# Altium PCB LED_Driver.PcbDoc
Units mil, origin at the board's own origin, x right, y up, seen from the top; angles counter-clockwise.
Board outline 779.9 x 913.27 mil, 2 copper layers (Top Layer, Bottom Layer); 30 components, 21 nets, 95 pads, 11 vias.
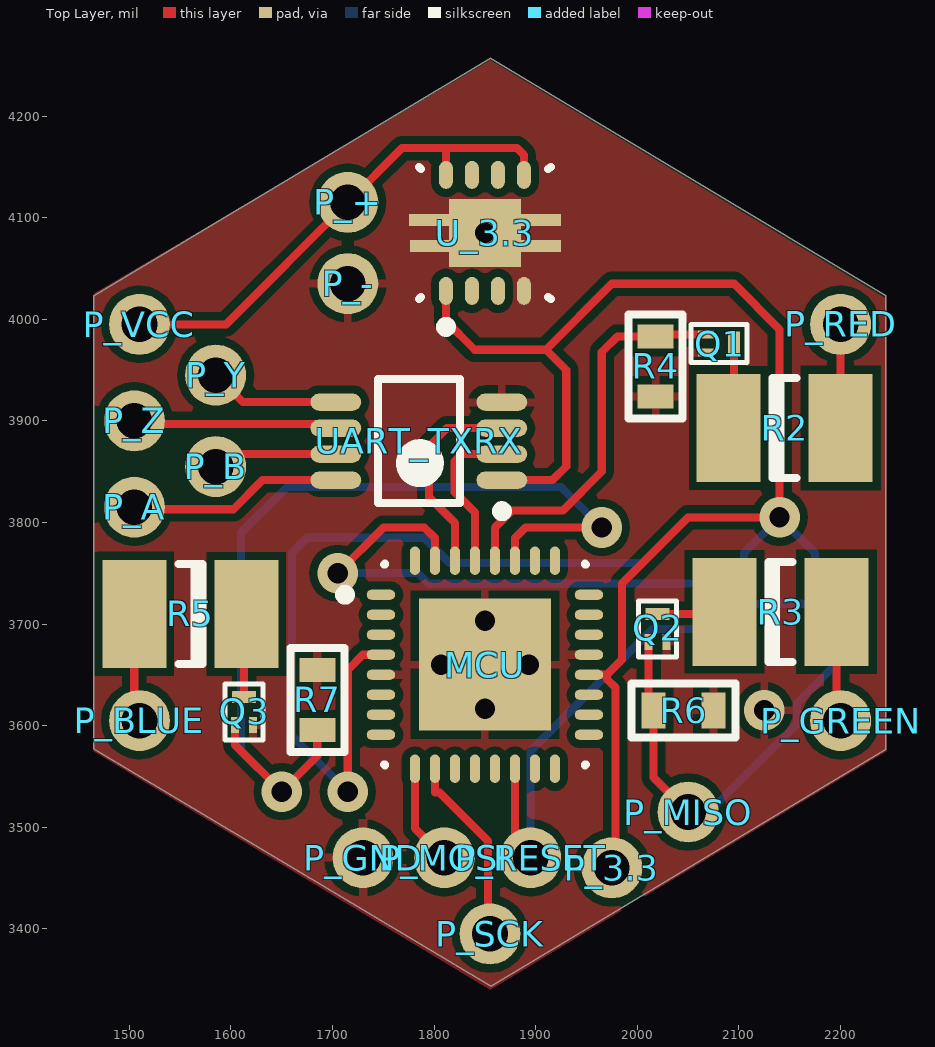
[diagram p0: Top Layer view]
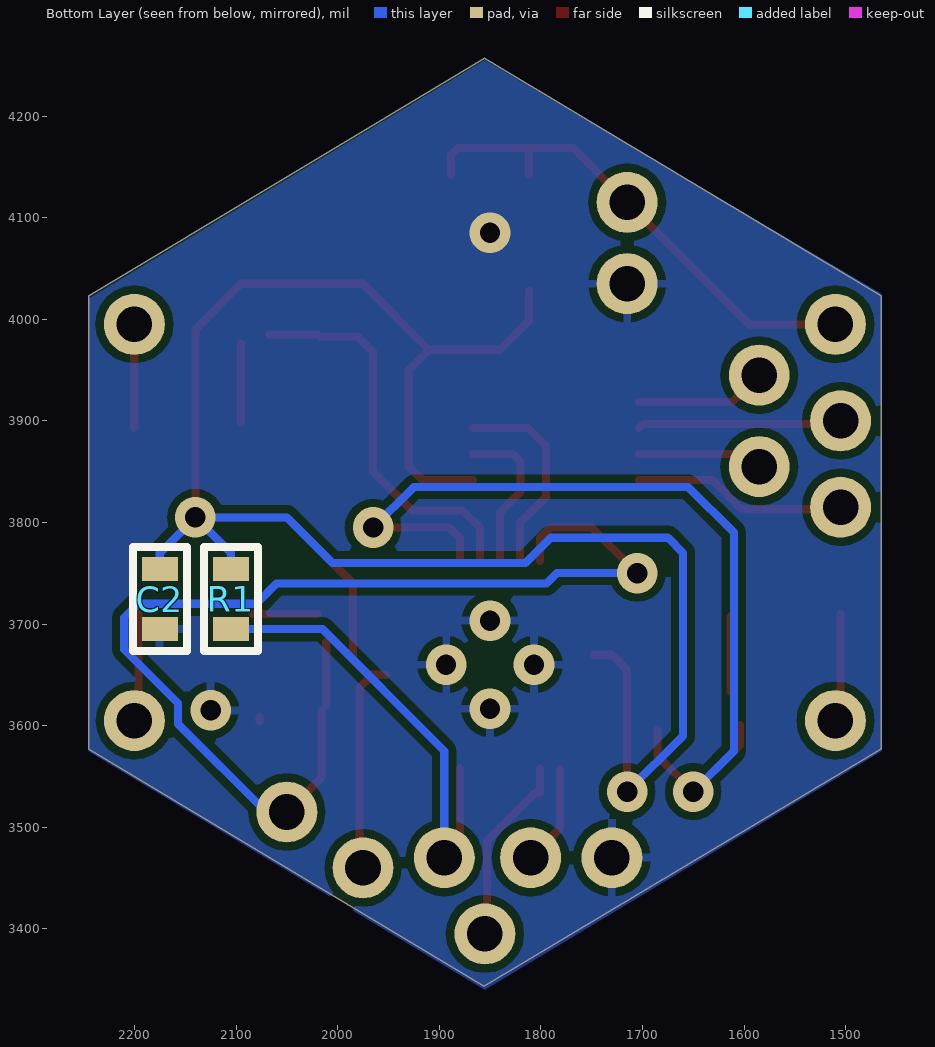
[diagram p1: Bottom Layer view, seen from below]

## Layer stack, top to bottom
Top Layer: signal copper 1.4
Dielectric: dielectric 12.6, FR-4, Dk 4.8
Bottom Layer: signal copper 1.4

## Board outline
1465.14,4023.09 1464.84,3577.09 1855.97,3343.58 2244.75,3576.85 2244.7,4023.18 1855.26,4256.85

## Design rules (kind name [scope] priority, off if disabled: settings)
Clearance [All] p1: gap=8
ComponentClearance [All] p1: gap=5 collisioncheckmode=3 verticalgap=10 showdistances=FALSE
HoleSize [All] p1: absolutevalues=TRUE maxlimit=100 minlimit=20 maxpercent=80.000 minpercent=20.000
PlaneConnect Power_Thermal_Plane [(InNet('GND') AND InComponent('U_3.3'))] p1: planeconnectstyle=Direct reliefexpansion=20 reliefentries=4 reliefconductorwidth=10 reliefairgap=10
PlaneConnect [All] p2: planeconnectstyle=Relief reliefexpansion=20 reliefentries=4 reliefconductorwidth=8 reliefairgap=8
PolygonConnect Power_Thermal_Poly [InNet('GND') AND InComponent('U_3.3')] p1: connectstyle=Direct reliefconductorwidth=10 reliefentries=4 polygonreliefangle="90 Angle"
PolygonConnect [All] p2: connectstyle=Relief reliefconductorwidth=8 reliefentries=4 polygonreliefangle="90 Angle"
RoutingVias [All] p1: holewidth=20 width=40 viastyle="Through Hole" minholewidth=20 minwidth=40 maxholewidth=20 maxwidth=40
SilkToSilkClearance [All] p1: silktosilkclearance=0
SilkscreenOverComponentPads [All] p1: minsilkscreentomaskgap=0
SolderMaskExpansion [All] p1: expansion=2
Width [All] p1: maxlimit=20 minlimit=8 preferedwidth=8
23 further rules are at their usual default settings.

## Components (designator, comment, footprint, x,y, rotation, side; value= is the part's Value field where it differs from the comment)
C2 "100nF" 0603 2175,3695 r90 bottom
MCU "ATTINY87-A15MZ" QFN50P500X500X100-32N 1850,3660 r0 top
P_3.3 "Hole" Hole 1975,3460 r90 top
P_+ "Hole" Hole 1715,4115 r90 top
P_- "Hole" Hole 1715,4035 r90 top
P_A "Hole" Hole 1505,3815 r90 top
P_B "Hole" Hole 1585,3855 r90 top
P_BLUE "Hole" Hole 1510,3605 r90 top
P_GND "Hole" Hole 1730,3470 r90 top
P_GREEN "Hole" Hole 2200,3605 r90 top
P_MISO "Hole" Hole 2050,3515 r90 top
P_MOSI "Hole" Hole 1810,3470 r90 top
P_RED "Hole" Hole 2200,3995 r90 top
P_RESET "Hole" Hole 1895,3470 r90 top
P_SCK "Hole" Hole 1855,3395 r90 top
P_VCC "Hole" Hole 1510,3995 r90 top
P_Y "Hole" Hole 1585,3945 r90 top
P_Z "Hole" Hole 1505,3900 r90 top
Q1 "2N7002BKM" "SOT883 / SC-101" 2095,3976 r0 top
Q2 "2N7002BKM" "SOT883 / SC-101" 2020,3710 r90 top
Q3 "2N7002BKM" "SOT883 / SC-101" 1613,3628 r90 top
R1 "4k3" 0603 2105,3695 r90 bottom
R2 "3R9" 1210 2145,3893 r0 top
R3 "R36" 1210 2141,3712 r0 top
R4 "10k" 0603 2018,3924 r90 top
R5 "R68" 1210 1560,3710 r180 top
R6 "10k" 0603 2075,3615 r180 top
R7 "10k" 0603 1685,3655 r270 top
U_3.3 "TPS73633DRBR" "TI - DRB / QFN65P300X300X100-8L" 1850,4085 r90 top
UART_TXRX "SN65LVDS179" "TI - DGK / TSOP65P490X110-8L" 1785,3880 r180 top

## Footprints (in the part's own frame and the unit in brackets; to place one, negate y for a bottom-side part, rotate by r counter-clockwise, add the part's x,y. Pads: shape width x height; smd on the part's side, far side on the other; paste and mask are expansions set on the pad)
0603 [mm] "Non polarized 0603 footprint"
  rect 0.6x0.9 smd: 1(0,0) 2(1.5,0)
  silkscreen extent -0.55,-0.67 2.05,0.67
1210 [mm] "Chip Capacitor; Body 3.2 x 2.5 mm (LxW typ)"
  rect 1.6x2.7 smd: 1(-1.4,0) 2(1.4,0)
  silkscreen extent -0.3,-1.25 0.3,1.25
Hole [mil] "A hole to solder a wire to."
  round 60 hole 35: 1(0,0)
QFN50P500X500X100-32N [mm] "QFN, 32-Leads, Body 4.9x4.9mm (max), Pitch 0.50mm, IPC Medium Density"
  oval 0.711x0.254 smd: 1(-2.6,1.75) 2(-2.6,1.25) 3(-2.6,0.75) 4(-2.6,0.25) 5(-2.6,-0.25) 6(-2.6,-0.75) 7(-2.6,-1.25) 8(-2.6,-1.75) 17(2.6,-1.75) 18(2.6,-1.25) 19(2.6,-0.75) 20(2.6,-0.25) 21(2.6,0.25) 22(2.6,0.75) 23(2.6,1.25) 24(2.6,1.75)
  oval 0.254x0.711 smd: 9(-1.75,-2.6) 10(-1.25,-2.6) 11(-0.75,-2.6) 12(-0.25,-2.6) 13(0.25,-2.6) 14(0.75,-2.6) 15(1.25,-2.6) 16(1.75,-2.6) 25(1.75,2.6) 26(1.25,2.6) 27(0.75,2.6) 28(0.25,2.6) 29(-0.25,2.6) 30(-0.75,2.6) 31(-1.25,2.6) 32(-1.75,2.6)
  rect 3.3x3.3 smd: 33(0,0)
  silkscreen extent -3.62,-2.53 2.53,2.52, body extent -2.45,-2.45 2.45,2.45, height 1
"SOT883 / SC-101" [mm]
  rrect5% 0.4x0.2 smd: 1(-0.7,0.225) 2(-0.7,-0.225)
  rrect5% 0.3x0.6 smd: 3(0,0)
  silkscreen extent -1.07,-0.48 0.33,0.48, body extent -1.05,-0.45 0.3,0.45, height 0.5
"TI - DGK / TSOP65P490X110-8L" [mm] "TSOP, 8-Leads, Body 3.1x3.1mm (max), Pitch 0.65mm, IPC High Density"
  oval 1.27x0.432 smd: 1(-2.075,0.975) 2(-2.075,0.325) 3(-2.075,-0.325) 4(-2.075,-0.975) 5(2.075,-0.975) 6(2.075,-0.325) 7(2.075,0.325) 8(2.075,0.975)
  silkscreen extent -2.2,-1.55 1.02,1.87, body extent -1.55,-1.55 1.55,1.55, height 1.1
"TI - DRB / QFN65P300X300X100-8L" [mm] "QFN, 8-Leads, Body 3.2x3.2mm (max), Pitch 0.65mm, IPC High Density"
  oval 0.7x0.35 smd: 1(-1.45,0.975) 2(-1.45,0.325) 3(-1.45,-0.325) 4(-1.45,-0.975) 5(1.45,-0.975) 6(1.45,-0.325) 7(1.45,0.325) 8(1.45,0.975)
  rect 0.3x1 smd: 9(-0.325,1.375) 9(-0.325,-1.4) 9(0.325,1.4) 9(0.325,-1.4)
  rect 1.7x1.8 smd: 9(0,0)
  silkscreen extent -2.47,-1.65 1.65,1.65, body extent -1.58,-1.58 1.58,1.58, height 1

## Part data
C2: library part "CP_100nF 0603", "CAP CER .10UF 50V X5R 0603"
MCU: "MCU AVR 8K FLASH 15MHZ 32QFN"
P_3.3 P_+ P_- P_A P_B P_BLUE P_GND P_GREEN P_MISO P_MOSI P_RED P_RESET P_SCK P_VCC P_Y P_Z: library part Solder_Hole, "A hole to solder a wire to."
Q1 Q2 Q3: library part 2N7002BKM,315, "MOSFET N-CH 60V 450MA SOT883"
R1: library part "RS_4k3 0603", "RES 4.3K OHM 1/10W 5% 0603 SMD"
R2: library part CRCW12103R90JNEA, "RES 3.9 OHM 1/2W 5% 1210 SMD"
R3: library part MCR25JZHFLR360, "RES .36 OHM 1/2W 1% 1210 SMD"
R4 R6 R7: library part "RS_10k 0603", "RES 10.0K OHM 1/10W 1% 0603 SMD"
R5: library part MCR25JZHFLR680, "RES .68 OHM 1/2W 1% 1210 SMD"
U_3.3: "IC LDO REG 400MA NO CAP 8-SON"
UART_TXRX: library part SN65LVDS179DGK, "High-Speed Differential Line Driver and Receiver"

## Via types
v1: diameter 40, hole 20, Top Layer to Bottom Layer, 6 vias
v2: diameter 40, hole 20, Top Layer to Bottom Layer, tented top, 5 vias

## Nets (pads, with @x,y where several pads share a name; then routed paths per layer and width w, separated by ;. In a path a pad name is that pad's centre, name@x,y a point inside that pad or via, vN(x,y) a via of type N, cw(c..) or ccw(c..) an arc to the next point about the centre after c; other vN are vias at no path point)
BLUE_PWM: MCU.27 Q3.1 R7.2 | length 933.6
  Top Layer w8: Q3.1 1604.14,3580.86 v1(1650,3535) 1685,3570 R7.2 ; MCU.27 1879.53,3784.53 1890,3795 v1(1965,3795)
  Bottom Layer w8: v1(1650,3535) 1610,3575 1610,3790 1655,3835 1925,3835 v1(1965,3795)
GND: C2.1 MCU.5 MCU.21 MCU.33 P_-.1 P_GND.1 Q1.2 Q2.2 Q3.2 R4.1 R6.1 R7.1 U_3.3.4 U_3.3.9 UART_TXRX.4 | length 4.3
  Top Layer w8: R6.1@2076.89,3604.11 R6.1@2076.89,3608.44
  other v1: 2125,3615
  other v2: 1850,3616.76 1806.76,3660 1893.24,3660 1850,3703.24 1850,4085
GREEN_PWM: MCU.31 P_MISO.1 Q2.1 R6.2 | length 1120.1
  Top Layer w8: v1(1705,3750) 1750,3795 1790.31,3795 1800.79,3784.53 MCU.31 ; R6.2@2011.14,3619.8 Q2.1 ; R6.2 2015.94,3549.06 P_MISO.1
  Bottom Layer w8: v1@1695.31,3750.31 1783.91,3750.31 1794.22,3740 2060,3740 2080,3720 2196.5,3720 2210,3706.5 2210,3675 2157,3622 2157,3601.75 2070.25,3515 P_MISO.1
MOSI: MCU.9 P_MOSI.1 | length 99.6
  Top Layer w8: MCU.9 1781.1,3498.9 P_MOSI.1
NetMCU_29: MCU.29 UART_TXRX.2 | length 155.7
  Top Layer w8: MCU.29 1840.16,3809.84 1820,3830 1820,3860 1827.2,3867.2 UART_TXRX.2
NetMCU_30: MCU.30 UART_TXRX.3 | length 202.3
  Top Layer w8: MCU.30 1820.47,3799.53 1795,3825 1795,3875 1812.8,3892.8 UART_TXRX.3
NetP_A_1: P_A.1 UART_TXRX.8 | length 211
  Top Layer w8: P_A.1 1507,3813 1602.4,3813 1631.01,3841.61 UART_TXRX.8
NetP_B_1: P_B.1 UART_TXRX.7 | length 106.1
  Top Layer w8: P_B.1@1597.2,3867.2 UART_TXRX.7
NetP_BLUE_1: P_BLUE.1 R5.2 | length 99.9
  Top Layer w8: P_BLUE.1@1504.88,3610.12 R5.2
NetP_GREEN_1: P_GREEN.1 R3.2 | length 103.1
  Top Layer w8: P_GREEN.1@2196.12,3608.88 R3.2
NetP_RED_1: P_RED.1 R2.2 | length 101.9
  Top Layer w8: R2.2 P_RED.1@2200.12,3994.88
NetP_Y_1: P_Y.1 UART_TXRX.5 | length 129.3
  Top Layer w8: P_Y.1 1611.61,3918.39 UART_TXRX.5
NetP_Z_1: P_Z.1 UART_TXRX.6 | length 197
  Top Layer w8: P_Z.1@1508,3897 1699.1,3897 UART_TXRX.6
NetQ1_3: Q1.3 R2.1 | length 77.9
  Top Layer w8: R2.1@2095,3898.12 Q1.3
NetQ2_3: Q2.3 R3.1 | length 63.9
  Top Layer w8: Q2.3 R3.1@2083.88,3710
NetQ3_3: Q3.3 R5.1 | length 74.9
  Top Layer w8: Q3.3@1613,3633 R5.1@1613,3707.88
R\E\S\E\T\: MCU.14 P_RESET.1 R1.1 | length 436.9
  Top Layer w8: P_RESET.1@1879.53,3485.47 MCU.14
  Bottom Layer w8: P_RESET.1 1895,3575 2015,3695 R1.1
RED_PWM: MCU.28 Q1.1 R4.2 | length 385.2
  Top Layer w8: MCU.28 1859.84,3794.84 1876.85,3811.85 1926.85,3811.85 1965,3850 1965,3967.7 1980.36,3983.06 R4.2 ; R4.2@2019.8,3984.86 Q1.1
SCK: MCU.10 P_SCK.1 | length 187.7
  Top Layer w8: MCU.10 1800.79,3534.21 1805.18,3534.21 1853,3486.4 1853,3397 P_SCK.1
V_3.3: C2.2 MCU.4 MCU.20 P_3.3.1 R1.2 U_3.3.1 UART_TXRX.1 | length 2340.8
  Top Layer w8: v1(1715,3535) 1715,3654.84 1730,3669.84 MCU.4 ; U_3.3.1 1811.61,3998.39 1840,3970 1910,3970 ; UART_TXRX.1 1916.61,3841.61 1930,3855 1930,3950 1910,3970 ; MCU.20 1970.16,3650.16 ; P_3.3.1@1978.36,3463.36 1978.36,3637.51 1970.16,3645.72 1970.16,3650.16 ; 1910,3970 1975,4035 2095,4035 2140,3990 v1(2140,3805) 2050,3805 1985,3740 1985,3665 1970.16,3650.16
  Bottom Layer w8: v1(1715,3535) 1660,3590 1660,3770 1675,3785 1790,3785 1815,3760 2005,3760 2050,3805 v1(2140,3805) ; R1.2 2105,3770 v1(2140,3805) ; C2.2 2175,3770 v1(2140,3805)
V_IN: P_+.1 P_VCC.1 U_3.3.5 U_3.3.8 | length 498.8
  Top Layer w8: P_VCC.1 1595,3995 P_+.1 1768.39,4168.39 1811.61,4168.39 ; U_3.3.8 1811.61,4168.39 ; U_3.3.5 1888.39,4161.61 1881.61,4168.39 1811.61,4168.39
pads on no net: MCU.1 MCU.2 MCU.3 MCU.6 MCU.7 MCU.8 MCU.11 MCU.12 MCU.13 MCU.15 MCU.16 MCU.17 MCU.18 MCU.19 MCU.22 MCU.23 MCU.24 MCU.25 MCU.26 MCU.32 U_3.3.2 U_3.3.3 U_3.3.6 U_3.3.7

## Polygon pours and split planes (outlines as drawn)
GND on Bottom Layer "GND" (solid, pour order 1000): 1855,4255 1465,4025 1465,3575 1855,3340 2245,3575 2245,4020
GND on Top Layer "GND" (solid, pour order 1000): 1855,4255 1465,4025 1465,3575 1855,3340 2245,3575 2245,4020